# EAGLE board dev-stick (EAGLE 5.07)
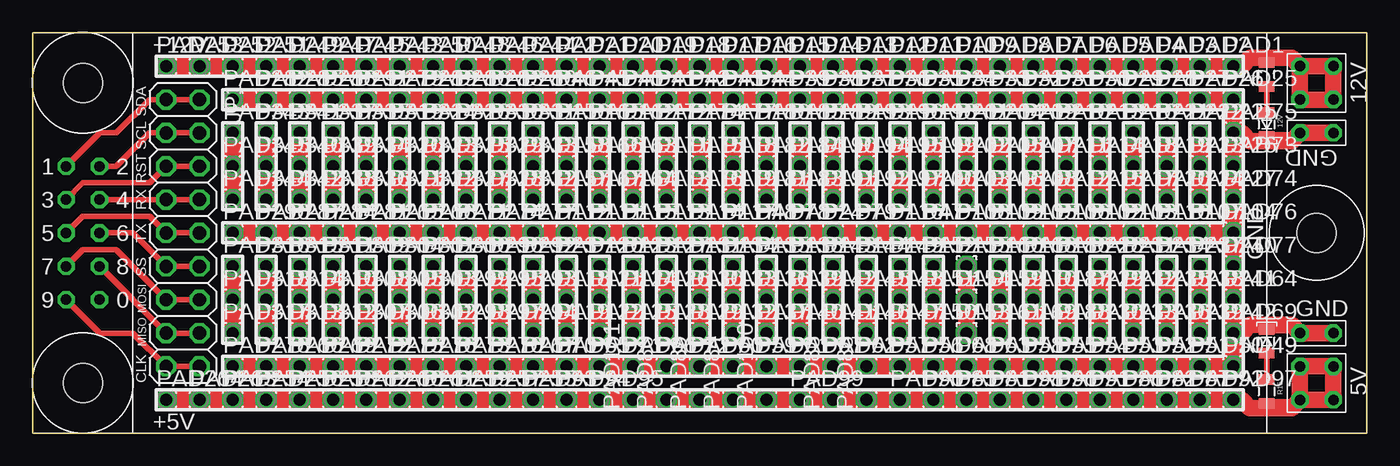
[diagram p0: board, top side]
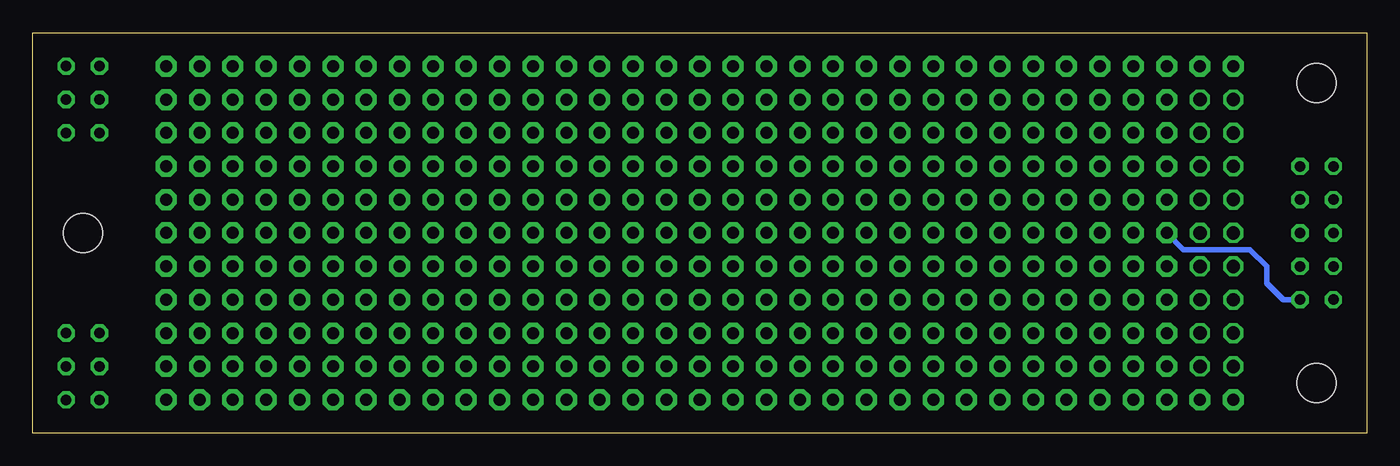
[diagram p1: board, bottom side, seen from below]

Size 101.6 x 30.48 mm. Coordinates in mm from the lower left corner, seen from the top.
Outline: 0,0 101.6,0 101.6,30.48 0,30.48 0,0
Copper layers (1*16): Top 0.035mm / dielectric 1.5mm / Bottom 0.035mm
Design rules "default": minimum track width 10mil, minimum drill 24mil, track to track 8mil, track to pad 8mil, pad to pad 8mil, via to via 8mil, smd to smd 8mil, copper to edge 40mil, drill to drill 8mil, minimum pad ring 10mil, minimum via ring 8mil, stop-mask expansion 4mil, vias tented up to drill 0mil, thermal gap 10mil
Net classes: 0 default: width 0.305 mm; 1 power: width 1.016 mm; 2 motors: width 0.762 mm

## Footprints (pad centres in the part's own frame; a part is rotated, then mirrored left to right if it is on the bottom)
LED-0805 = smd 1.2 x 0.8: A 0,-0.9; C 0,0.9
2X09 = drill 1.016 octagon: 1 -10.16,-1.27; 2 -10.16,1.27; 3 -7.62,-1.27; 4 -7.62,1.27; 5 -5.08,-1.27; 6 -5.08,1.27; 7 -2.54,-1.27; 8 -2.54,1.27; 9 0,-1.27; 10 0,1.27; 11 2.54,-1.27; 12 2.54,1.27; 13 5.08,-1.27; 14 5.08,1.27; 15 7.62,-1.27; 16 7.62,1.27; 17 10.16,-1.27; 18 10.16,1.27
1,6/0,9 = drill 0.914 pad 1.6 octagon: 1 0,0
0805 = smd 0.8 x 1.2: 1 -0.9,0; 2 0.9,0
MAKEITSTICK = drill 0.8 octagon: 5V1 96.52,5.08; 5V2 99.06,5.08; 5V3 96.52,2.54; 5V4 99.06,2.54; 12V1 96.52,27.94; 12V2 99.06,27.94; 12V3 96.52,25.4; 12V4 99.06,25.4; D1 2.54,20.32; D2 5.08,20.32; D3 2.54,17.78; D4 5.08,17.78; D5 2.54,15.24; D6 5.08,15.24; D7 2.54,12.7; D8 5.08,12.7; D9 2.54,10.16; D10 5.08,10.16; GND1 96.52,22.86; GND2 99.06,22.86; GND3 96.52,7.62; GND4 99.06,7.62 | hole 3: 3.81,26.67; 3.81,3.81; 97.79,15.24

## Placement (x,y rotation side)
5V  [LED-0805]  93.98,6.99 0 top
12V  [LED-0805]  93.98,23.5 180 top
JP1  [2X09]  11.43,15.24 270 top
PAD1  WIREPAD1,6/0,9  [1,6/0,9]  91.44,27.94 0 top
PAD2  WIREPAD1,6/0,9  [1,6/0,9]  88.9,27.94 0 top
PAD3  WIREPAD1,6/0,9  [1,6/0,9]  86.36,27.94 0 top
PAD4  WIREPAD1,6/0,9  [1,6/0,9]  83.82,27.94 0 top
PAD5  WIREPAD1,6/0,9  [1,6/0,9]  81.28,27.94 0 top
PAD6  WIREPAD1,6/0,9  [1,6/0,9]  78.74,27.94 0 top
PAD7  WIREPAD1,6/0,9  [1,6/0,9]  76.2,27.94 0 top
PAD8  WIREPAD1,6/0,9  [1,6/0,9]  73.66,27.94 0 top
PAD9  WIREPAD1,6/0,9  [1,6/0,9]  71.12,27.94 0 top
PAD10  WIREPAD1,6/0,9  [1,6/0,9]  68.58,27.94 0 top
PAD11  WIREPAD1,6/0,9  [1,6/0,9]  66.04,27.94 0 top
PAD12  WIREPAD1,6/0,9  [1,6/0,9]  63.5,27.94 0 top
PAD13  WIREPAD1,6/0,9  [1,6/0,9]  60.96,27.94 0 top
PAD14  WIREPAD1,6/0,9  [1,6/0,9]  58.42,27.94 0 top
PAD15  WIREPAD1,6/0,9  [1,6/0,9]  55.88,27.94 0 top
PAD16  WIREPAD1,6/0,9  [1,6/0,9]  53.34,27.94 0 top
PAD17  WIREPAD1,6/0,9  [1,6/0,9]  50.8,27.94 0 top
PAD18  WIREPAD1,6/0,9  [1,6/0,9]  48.26,27.94 0 top
PAD19  WIREPAD1,6/0,9  [1,6/0,9]  45.72,27.94 0 top
PAD20  WIREPAD1,6/0,9  [1,6/0,9]  43.18,27.94 0 top
PAD21  WIREPAD1,6/0,9  [1,6/0,9]  40.64,27.94 0 top
PAD22  WIREPAD1,6/0,9  [1,6/0,9]  38.1,27.94 0 top
PAD23  WIREPAD1,6/0,9  [1,6/0,9]  38.1,12.7 0 top
PAD24  WIREPAD1,6/0,9  [1,6/0,9]  58.42,15.24 0 top
PAD25  WIREPAD1,6/0,9  [1,6/0,9]  91.44,25.4 0 top
PAD26  WIREPAD1,6/0,9  [1,6/0,9]  88.9,25.4 0 top
PAD27  WIREPAD1,6/0,9  [1,6/0,9]  86.36,25.4 0 top
PAD28  WIREPAD1,6/0,9  [1,6/0,9]  83.82,25.4 0 top
PAD29  WIREPAD1,6/0,9  [1,6/0,9]  81.28,25.4 0 top
PAD30  WIREPAD1,6/0,9  [1,6/0,9]  78.74,25.4 0 top
PAD31  WIREPAD1,6/0,9  [1,6/0,9]  76.2,25.4 0 top
PAD32  WIREPAD1,6/0,9  [1,6/0,9]  73.66,25.4 0 top
PAD33  WIREPAD1,6/0,9  [1,6/0,9]  71.12,25.4 0 top
PAD34  WIREPAD1,6/0,9  [1,6/0,9]  68.58,25.4 0 top
PAD35  WIREPAD1,6/0,9  [1,6/0,9]  66.04,25.4 0 top
PAD36  WIREPAD1,6/0,9  [1,6/0,9]  63.5,25.4 0 top
PAD37  WIREPAD1,6/0,9  [1,6/0,9]  60.96,25.4 0 top
PAD38  WIREPAD1,6/0,9  [1,6/0,9]  58.42,25.4 0 top
PAD39  WIREPAD1,6/0,9  [1,6/0,9]  55.88,25.4 0 top
PAD40  WIREPAD1,6/0,9  [1,6/0,9]  43.18,25.4 0 top
PAD41  WIREPAD1,6/0,9  [1,6/0,9]  45.72,25.4 0 top
PAD42  WIREPAD1,6/0,9  [1,6/0,9]  48.26,25.4 0 top
PAD43  WIREPAD1,6/0,9  [1,6/0,9]  50.8,25.4 0 top
PAD44  WIREPAD1,6/0,9  [1,6/0,9]  53.34,25.4 0 top
PAD45  WIREPAD1,6/0,9  [1,6/0,9]  40.64,25.4 0 top
PAD46  WIREPAD1,6/0,9  [1,6/0,9]  38.1,25.4 0 top
PAD47  WIREPAD1,6/0,9  [1,6/0,9]  66.04,15.24 0 top
PAD48  WIREPAD1,6/0,9  [1,6/0,9]  53.34,15.24 0 top
PAD49  WIREPAD1,6/0,9  [1,6/0,9]  91.44,5.08 0 top
PAD50  WIREPAD1,6/0,9  [1,6/0,9]  88.9,5.08 0 top
PAD51  WIREPAD1,6/0,9  [1,6/0,9]  86.36,5.08 0 top
PAD52  WIREPAD1,6/0,9  [1,6/0,9]  83.82,5.08 0 top
PAD53  WIREPAD1,6/0,9  [1,6/0,9]  81.28,5.08 0 top
PAD54  WIREPAD1,6/0,9  [1,6/0,9]  78.74,5.08 0 top
PAD55  WIREPAD1,6/0,9  [1,6/0,9]  76.2,5.08 0 top
PAD56  WIREPAD1,6/0,9  [1,6/0,9]  66.04,5.08 0 top
PAD57  WIREPAD1,6/0,9  [1,6/0,9]  63.5,5.08 0 top
PAD58  WIREPAD1,6/0,9  [1,6/0,9]  73.66,5.08 0 top
PAD59  WIREPAD1,6/0,9  [1,6/0,9]  53.34,5.08 0 top
PAD60  WIREPAD1,6/0,9  [1,6/0,9]  50.8,5.08 0 top
PAD61  WIREPAD1,6/0,9  [1,6/0,9]  55.88,5.08 0 top
PAD62  WIREPAD1,6/0,9  [1,6/0,9]  60.96,5.08 0 top
PAD63  WIREPAD1,6/0,9  [1,6/0,9]  71.12,5.08 0 top
PAD64  WIREPAD1,6/0,9  [1,6/0,9]  91.44,10.16 0 top
PAD65  WIREPAD1,6/0,9  [1,6/0,9]  40.64,5.08 0 top
PAD66  WIREPAD1,6/0,9  [1,6/0,9]  45.72,5.08 0 top
PAD67  WIREPAD1,6/0,9  [1,6/0,9]  58.42,5.08 0 top
PAD68  WIREPAD1,6/0,9  [1,6/0,9]  68.58,5.08 0 top
PAD69  WIREPAD1,6/0,9  [1,6/0,9]  91.44,7.62 0 top
PAD70  WIREPAD1,6/0,9  [1,6/0,9]  38.1,5.08 0 top
PAD71  WIREPAD1,6/0,9  [1,6/0,9]  43.18,5.08 0 top
PAD72  WIREPAD1,6/0,9  [1,6/0,9]  48.26,5.08 0 top
PAD73  WIREPAD1,6/0,9  [1,6/0,9]  91.44,20.32 0 top
PAD74  WIREPAD1,6/0,9  [1,6/0,9]  91.44,17.78 0 top
PAD75  WIREPAD1,6/0,9  [1,6/0,9]  91.44,22.86 0 top
PAD76  WIREPAD1,6/0,9  [1,6/0,9]  91.44,15.24 0 top
PAD77  WIREPAD1,6/0,9  [1,6/0,9]  91.44,12.7 0 top
PAD78  WIREPAD1,6/0,9  [1,6/0,9]  55.88,15.24 0 top
PAD79  WIREPAD1,6/0,9  [1,6/0,9]  60.96,15.24 0 top
PAD80  WIREPAD1,6/0,9  [1,6/0,9]  48.26,2.54 90 top
PAD81  WIREPAD1,6/0,9  [1,6/0,9]  71.12,2.54 0 top
PAD82  WIREPAD1,6/0,9  [1,6/0,9]  83.82,2.54 0 top
PAD83  WIREPAD1,6/0,9  [1,6/0,9]  60.96,2.54 90 top
PAD84  WIREPAD1,6/0,9  [1,6/0,9]  53.34,2.54 90 top
PAD85  WIREPAD1,6/0,9  [1,6/0,9]  68.58,2.54 0 top
PAD86  WIREPAD1,6/0,9  [1,6/0,9]  81.28,2.54 0 top
PAD87  WIREPAD1,6/0,9  [1,6/0,9]  86.36,2.54 0 top
PAD88  WIREPAD1,6/0,9  [1,6/0,9]  63.5,2.54 90 top
PAD89  WIREPAD1,6/0,9  [1,6/0,9]  50.8,2.54 90 top
PAD90  WIREPAD1,6/0,9  [1,6/0,9]  66.04,2.54 0 top
PAD91  WIREPAD1,6/0,9  [1,6/0,9]  78.74,2.54 0 top
PAD92  WIREPAD1,6/0,9  [1,6/0,9]  88.9,2.54 0 top
PAD93  WIREPAD1,6/0,9  [1,6/0,9]  38.1,2.54 0 top
PAD94  WIREPAD1,6/0,9  [1,6/0,9]  40.64,2.54 0 top
PAD95  WIREPAD1,6/0,9  [1,6/0,9]  43.18,2.54 0 top
PAD96  WIREPAD1,6/0,9  [1,6/0,9]  76.2,2.54 0 top
PAD97  WIREPAD1,6/0,9  [1,6/0,9]  91.44,2.54 0 top
PAD98  WIREPAD1,6/0,9  [1,6/0,9]  73.66,2.54 0 top
PAD99  WIREPAD1,6/0,9  [1,6/0,9]  58.42,2.54 0 top
PAD100  WIREPAD1,6/0,9  [1,6/0,9]  55.88,2.54 90 top
PAD101  WIREPAD1,6/0,9  [1,6/0,9]  45.72,2.54 90 top
PAD102  WIREPAD1,6/0,9  [1,6/0,9]  78.74,15.24 0 top
PAD103  WIREPAD1,6/0,9  [1,6/0,9]  81.28,15.24 0 top
PAD104  WIREPAD1,6/0,9  [1,6/0,9]  88.9,15.24 0 top
PAD105  WIREPAD1,6/0,9  [1,6/0,9]  73.66,15.24 0 top
PAD106  WIREPAD1,6/0,9  [1,6/0,9]  76.2,15.24 0 top
PAD107  WIREPAD1,6/0,9  [1,6/0,9]  86.36,15.24 0 top
PAD108  WIREPAD1,6/0,9  [1,6/0,9]  68.58,15.24 0 top
PAD109  WIREPAD1,6/0,9  [1,6/0,9]  71.12,15.24 0 top
PAD110  WIREPAD1,6/0,9  [1,6/0,9]  83.82,15.24 0 top
PAD111  WIREPAD1,6/0,9  [1,6/0,9]  40.64,15.24 0 top
PAD112  WIREPAD1,6/0,9  [1,6/0,9]  38.1,15.24 0 top
PAD113  WIREPAD1,6/0,9  [1,6/0,9]  45.72,15.24 0 top
PAD114  WIREPAD1,6/0,9  [1,6/0,9]  48.26,15.24 0 top
PAD115  WIREPAD1,6/0,9  [1,6/0,9]  43.18,15.24 0 top
PAD116  WIREPAD1,6/0,9  [1,6/0,9]  63.5,15.24 0 top
PAD117  WIREPAD1,6/0,9  [1,6/0,9]  50.8,15.24 0 top
PAD118  WIREPAD1,6/0,9  [1,6/0,9]  38.1,10.16 0 top
PAD119  WIREPAD1,6/0,9  [1,6/0,9]  38.1,7.62 0 top
PAD120  WIREPAD1,6/0,9  [1,6/0,9]  40.64,12.7 0 top
PAD121  WIREPAD1,6/0,9  [1,6/0,9]  40.64,10.16 0 top
PAD122  WIREPAD1,6/0,9  [1,6/0,9]  40.64,7.62 0 top
PAD123  WIREPAD1,6/0,9  [1,6/0,9]  43.18,12.7 0 top
PAD124  WIREPAD1,6/0,9  [1,6/0,9]  43.18,10.16 0 top
PAD125  WIREPAD1,6/0,9  [1,6/0,9]  43.18,7.62 0 top
PAD126  WIREPAD1,6/0,9  [1,6/0,9]  45.72,10.16 0 top
PAD127  WIREPAD1,6/0,9  [1,6/0,9]  45.72,12.7 0 top
PAD128  WIREPAD1,6/0,9  [1,6/0,9]  45.72,7.62 0 top
PAD129  WIREPAD1,6/0,9  [1,6/0,9]  48.26,7.62 0 top
PAD130  WIREPAD1,6/0,9  [1,6/0,9]  48.26,10.16 0 top
PAD131  WIREPAD1,6/0,9  [1,6/0,9]  48.26,12.7 0 top
PAD132  WIREPAD1,6/0,9  [1,6/0,9]  50.8,7.62 0 top
PAD133  WIREPAD1,6/0,9  [1,6/0,9]  50.8,10.16 0 top
PAD134  WIREPAD1,6/0,9  [1,6/0,9]  50.8,12.7 0 top
PAD135  WIREPAD1,6/0,9  [1,6/0,9]  53.34,12.7 0 top
PAD136  WIREPAD1,6/0,9  [1,6/0,9]  53.34,10.16 0 top
PAD137  WIREPAD1,6/0,9  [1,6/0,9]  53.34,7.62 0 top
PAD138  WIREPAD1,6/0,9  [1,6/0,9]  55.88,12.7 0 top
PAD139  WIREPAD1,6/0,9  [1,6/0,9]  55.88,10.16 0 top
PAD140  WIREPAD1,6/0,9  [1,6/0,9]  55.88,7.62 0 top
PAD141  WIREPAD1,6/0,9  [1,6/0,9]  58.42,7.62 0 top
PAD142  WIREPAD1,6/0,9  [1,6/0,9]  58.42,10.16 0 top
PAD143  WIREPAD1,6/0,9  [1,6/0,9]  58.42,12.7 0 top
PAD144  WIREPAD1,6/0,9  [1,6/0,9]  60.96,12.7 0 top
PAD145  WIREPAD1,6/0,9  [1,6/0,9]  60.96,10.16 0 top
PAD146  WIREPAD1,6/0,9  [1,6/0,9]  60.96,7.62 0 top
PAD147  WIREPAD1,6/0,9  [1,6/0,9]  63.5,7.62 0 top
PAD148  WIREPAD1,6/0,9  [1,6/0,9]  63.5,10.16 0 top
PAD149  WIREPAD1,6/0,9  [1,6/0,9]  63.5,12.7 0 top
PAD150  WIREPAD1,6/0,9  [1,6/0,9]  66.04,7.62 0 top
PAD151  WIREPAD1,6/0,9  [1,6/0,9]  66.04,10.16 0 top
PAD152  WIREPAD1,6/0,9  [1,6/0,9]  66.04,12.7 0 top
PAD153  WIREPAD1,6/0,9  [1,6/0,9]  68.58,7.62 0 top
PAD154  WIREPAD1,6/0,9  [1,6/0,9]  68.58,10.16 0 top
PAD155  WIREPAD1,6/0,9  [1,6/0,9]  68.58,12.7 0 top
PAD156  WIREPAD1,6/0,9  [1,6/0,9]  38.1,22.86 0 top
PAD157  WIREPAD1,6/0,9  [1,6/0,9]  38.1,17.78 0 top
PAD158  WIREPAD1,6/0,9  [1,6/0,9]  38.1,20.32 0 top
PAD159  WIREPAD1,6/0,9  [1,6/0,9]  71.12,10.16 0 top
PAD160  WIREPAD1,6/0,9  [1,6/0,9]  71.12,12.7 0 top
PAD161  WIREPAD1,6/0,9  [1,6/0,9]  71.12,7.62 0 top
PAD162  WIREPAD1,6/0,9  [1,6/0,9]  43.18,22.86 0 top
PAD163  WIREPAD1,6/0,9  [1,6/0,9]  43.18,20.32 0 top
PAD164  WIREPAD1,6/0,9  [1,6/0,9]  43.18,17.78 0 top
PAD165  WIREPAD1,6/0,9  [1,6/0,9]  40.64,22.86 0 top
PAD166  WIREPAD1,6/0,9  [1,6/0,9]  40.64,20.32 0 top
PAD167  WIREPAD1,6/0,9  [1,6/0,9]  40.64,17.78 0 top
PAD168  WIREPAD1,6/0,9  [1,6/0,9]  73.66,12.7 0 top
PAD169  WIREPAD1,6/0,9  [1,6/0,9]  73.66,7.62 0 top
PAD170  WIREPAD1,6/0,9  [1,6/0,9]  73.66,10.16 0 top
PAD171  WIREPAD1,6/0,9  [1,6/0,9]  45.72,20.32 0 top
PAD172  WIREPAD1,6/0,9  [1,6/0,9]  45.72,22.86 0 top
PAD173  WIREPAD1,6/0,9  [1,6/0,9]  45.72,17.78 0 top
PAD174  WIREPAD1,6/0,9  [1,6/0,9]  48.26,22.86 0 top
PAD175  WIREPAD1,6/0,9  [1,6/0,9]  48.26,20.32 0 top
PAD176  WIREPAD1,6/0,9  [1,6/0,9]  48.26,17.78 0 top
PAD177  WIREPAD1,6/0,9  [1,6/0,9]  50.8,22.86 0 top
PAD178  WIREPAD1,6/0,9  [1,6/0,9]  50.8,20.32 0 top
PAD179  WIREPAD1,6/0,9  [1,6/0,9]  50.8,17.78 0 top
PAD180  WIREPAD1,6/0,9  [1,6/0,9]  53.34,22.86 0 top
PAD181  WIREPAD1,6/0,9  [1,6/0,9]  53.34,17.78 0 top
PAD182  WIREPAD1,6/0,9  [1,6/0,9]  53.34,20.32 0 top
PAD183  WIREPAD1,6/0,9  [1,6/0,9]  55.88,17.78 0 top
PAD184  WIREPAD1,6/0,9  [1,6/0,9]  55.88,20.32 0 top
PAD185  WIREPAD1,6/0,9  [1,6/0,9]  55.88,22.86 0 top
PAD186  WIREPAD1,6/0,9  [1,6/0,9]  76.2,12.7 0 top
PAD187  WIREPAD1,6/0,9  [1,6/0,9]  76.2,10.16 0 top
PAD188  WIREPAD1,6/0,9  [1,6/0,9]  76.2,7.62 0 top
PAD189  WIREPAD1,6/0,9  [1,6/0,9]  58.42,22.86 0 top
PAD190  WIREPAD1,6/0,9  [1,6/0,9]  58.42,20.32 0 top
PAD191  WIREPAD1,6/0,9  [1,6/0,9]  58.42,17.78 0 top
PAD192  WIREPAD1,6/0,9  [1,6/0,9]  60.96,17.78 0 top
PAD193  WIREPAD1,6/0,9  [1,6/0,9]  60.96,22.86 0 top
PAD194  WIREPAD1,6/0,9  [1,6/0,9]  60.96,20.32 0 top
PAD195  WIREPAD1,6/0,9  [1,6/0,9]  63.5,20.32 0 top
PAD196  WIREPAD1,6/0,9  [1,6/0,9]  63.5,22.86 0 top
PAD197  WIREPAD1,6/0,9  [1,6/0,9]  63.5,17.78 0 top
PAD198  WIREPAD1,6/0,9  [1,6/0,9]  66.04,22.86 0 top
PAD199  WIREPAD1,6/0,9  [1,6/0,9]  66.04,20.32 0 top
PAD200  WIREPAD1,6/0,9  [1,6/0,9]  66.04,17.78 0 top
PAD201  WIREPAD1,6/0,9  [1,6/0,9]  68.58,22.86 0 top
PAD202  WIREPAD1,6/0,9  [1,6/0,9]  68.58,20.32 0 top
PAD203  WIREPAD1,6/0,9  [1,6/0,9]  68.58,17.78 0 top
PAD204  WIREPAD1,6/0,9  [1,6/0,9]  71.12,22.86 0 top
PAD205  WIREPAD1,6/0,9  [1,6/0,9]  71.12,20.32 0 top
PAD206  WIREPAD1,6/0,9  [1,6/0,9]  71.12,17.78 0 top
PAD207  WIREPAD1,6/0,9  [1,6/0,9]  73.66,20.32 0 top
PAD208  WIREPAD1,6/0,9  [1,6/0,9]  73.66,17.78 0 top
PAD209  WIREPAD1,6/0,9  [1,6/0,9]  73.66,22.86 0 top
PAD210  WIREPAD1,6/0,9  [1,6/0,9]  76.2,22.86 0 top
PAD211  WIREPAD1,6/0,9  [1,6/0,9]  76.2,20.32 0 top
PAD212  WIREPAD1,6/0,9  [1,6/0,9]  76.2,17.78 0 top
PAD213  WIREPAD1,6/0,9  [1,6/0,9]  78.74,22.86 0 top
PAD214  WIREPAD1,6/0,9  [1,6/0,9]  78.74,20.32 0 top
PAD215  WIREPAD1,6/0,9  [1,6/0,9]  78.74,17.78 0 top
PAD216  WIREPAD1,6/0,9  [1,6/0,9]  81.28,22.86 0 top
PAD217  WIREPAD1,6/0,9  [1,6/0,9]  81.28,17.78 0 top
PAD218  WIREPAD1,6/0,9  [1,6/0,9]  81.28,20.32 0 top
PAD219  WIREPAD1,6/0,9  [1,6/0,9]  83.82,20.32 0 top
PAD220  WIREPAD1,6/0,9  [1,6/0,9]  83.82,17.78 0 top
PAD221  WIREPAD1,6/0,9  [1,6/0,9]  83.82,22.86 0 top
PAD222  WIREPAD1,6/0,9  [1,6/0,9]  86.36,22.86 0 top
PAD223  WIREPAD1,6/0,9  [1,6/0,9]  86.36,20.32 0 top
PAD224  WIREPAD1,6/0,9  [1,6/0,9]  86.36,17.78 0 top
PAD225  WIREPAD1,6/0,9  [1,6/0,9]  88.9,22.86 0 top
PAD226  WIREPAD1,6/0,9  [1,6/0,9]  88.9,20.32 0 top
PAD227  WIREPAD1,6/0,9  [1,6/0,9]  88.9,17.78 0 top
PAD228  WIREPAD1,6/0,9  [1,6/0,9]  78.74,12.7 0 top
PAD229  WIREPAD1,6/0,9  [1,6/0,9]  78.74,10.16 0 top
PAD230  WIREPAD1,6/0,9  [1,6/0,9]  78.74,7.62 0 top
PAD231  WIREPAD1,6/0,9  [1,6/0,9]  81.28,12.7 0 top
PAD232  WIREPAD1,6/0,9  [1,6/0,9]  81.28,10.16 0 top
PAD233  WIREPAD1,6/0,9  [1,6/0,9]  81.28,7.62 0 top
PAD234  WIREPAD1,6/0,9  [1,6/0,9]  83.82,12.7 0 top
PAD235  WIREPAD1,6/0,9  [1,6/0,9]  83.82,10.16 0 top
PAD236  WIREPAD1,6/0,9  [1,6/0,9]  83.82,7.62 0 top
PAD237  WIREPAD1,6/0,9  [1,6/0,9]  86.36,12.7 0 top
PAD238  WIREPAD1,6/0,9  [1,6/0,9]  86.36,10.16 0 top
PAD239  WIREPAD1,6/0,9  [1,6/0,9]  86.36,7.62 0 top
PAD240  WIREPAD1,6/0,9  [1,6/0,9]  88.9,12.7 0 top
PAD241  WIREPAD1,6/0,9  [1,6/0,9]  88.9,10.16 0 top
PAD242  WIREPAD1,6/0,9  [1,6/0,9]  88.9,7.62 0 top
PAD243  WIREPAD1,6/0,9  [1,6/0,9]  25.4,27.94 0 top
PAD244  WIREPAD1,6/0,9  [1,6/0,9]  35.56,27.94 0 top
PAD245  WIREPAD1,6/0,9  [1,6/0,9]  22.86,27.94 0 top
PAD246  WIREPAD1,6/0,9  [1,6/0,9]  33.02,27.94 0 top
PAD247  WIREPAD1,6/0,9  [1,6/0,9]  20.32,27.94 0 top
PAD248  WIREPAD1,6/0,9  [1,6/0,9]  30.48,27.94 0 top
PAD249  WIREPAD1,6/0,9  [1,6/0,9]  17.78,27.94 0 top
PAD250  WIREPAD1,6/0,9  [1,6/0,9]  27.94,27.94 0 top
PAD251  WIREPAD1,6/0,9  [1,6/0,9]  15.24,27.94 0 top
PAD252  WIREPAD1,6/0,9  [1,6/0,9]  12.7,27.94 0 top
PAD253  WIREPAD1,6/0,9  [1,6/0,9]  10.16,27.94 0 top
PAD254  WIREPAD1,6/0,9  [1,6/0,9]  15.24,2.54 0 top
PAD255  WIREPAD1,6/0,9  [1,6/0,9]  35.56,2.54 0 top
PAD256  WIREPAD1,6/0,9  [1,6/0,9]  17.78,2.54 0 top
PAD257  WIREPAD1,6/0,9  [1,6/0,9]  33.02,2.54 0 top
PAD258  WIREPAD1,6/0,9  [1,6/0,9]  20.32,2.54 0 top
PAD259  WIREPAD1,6/0,9  [1,6/0,9]  30.48,2.54 0 top
PAD260  WIREPAD1,6/0,9  [1,6/0,9]  25.4,2.54 0 top
PAD261  WIREPAD1,6/0,9  [1,6/0,9]  27.94,2.54 0 top
PAD262  WIREPAD1,6/0,9  [1,6/0,9]  22.86,2.54 0 top
PAD263  WIREPAD1,6/0,9  [1,6/0,9]  12.7,2.54 0 top
PAD264  WIREPAD1,6/0,9  [1,6/0,9]  10.16,2.54 0 top
PAD265  WIREPAD1,6/0,9  [1,6/0,9]  25.4,15.24 0 top
PAD266  WIREPAD1,6/0,9  [1,6/0,9]  17.78,5.08 0 top
PAD267  WIREPAD1,6/0,9  [1,6/0,9]  35.56,5.08 0 top
PAD268  WIREPAD1,6/0,9  [1,6/0,9]  27.94,15.24 0 top
PAD269  WIREPAD1,6/0,9  [1,6/0,9]  20.32,5.08 0 top
PAD270  WIREPAD1,6/0,9  [1,6/0,9]  33.02,5.08 0 top
PAD271  WIREPAD1,6/0,9  [1,6/0,9]  30.48,15.24 0 top
PAD272  WIREPAD1,6/0,9  [1,6/0,9]  22.86,5.08 0 top
PAD273  WIREPAD1,6/0,9  [1,6/0,9]  30.48,5.08 0 top
PAD274  WIREPAD1,6/0,9  [1,6/0,9]  33.02,15.24 0 top
PAD275  WIREPAD1,6/0,9  [1,6/0,9]  25.4,5.08 0 top
PAD276  WIREPAD1,6/0,9  [1,6/0,9]  27.94,5.08 0 top
PAD277  WIREPAD1,6/0,9  [1,6/0,9]  35.56,15.24 0 top
PAD278  WIREPAD1,6/0,9  [1,6/0,9]  15.24,5.08 0 top
PAD279  WIREPAD1,6/0,9  [1,6/0,9]  25.4,25.4 0 top
PAD280  WIREPAD1,6/0,9  [1,6/0,9]  35.56,25.4 0 top
PAD281  WIREPAD1,6/0,9  [1,6/0,9]  22.86,15.24 0 top
PAD282  WIREPAD1,6/0,9  [1,6/0,9]  15.24,25.4 0 top
PAD283  WIREPAD1,6/0,9  [1,6/0,9]  33.02,25.4 0 top
PAD284  WIREPAD1,6/0,9  [1,6/0,9]  20.32,15.24 0 top
PAD285  WIREPAD1,6/0,9  [1,6/0,9]  17.78,25.4 0 top
PAD286  WIREPAD1,6/0,9  [1,6/0,9]  30.48,25.4 0 top
PAD287  WIREPAD1,6/0,9  [1,6/0,9]  17.78,15.24 0 top
PAD288  WIREPAD1,6/0,9  [1,6/0,9]  20.32,25.4 0 top
PAD289  WIREPAD1,6/0,9  [1,6/0,9]  27.94,25.4 0 top
PAD290  WIREPAD1,6/0,9  [1,6/0,9]  15.24,15.24 0 top
PAD291  WIREPAD1,6/0,9  [1,6/0,9]  22.86,25.4 0 top
PAD292  WIREPAD1,6/0,9  [1,6/0,9]  35.56,12.7 0 top
PAD293  WIREPAD1,6/0,9  [1,6/0,9]  35.56,10.16 0 top
PAD294  WIREPAD1,6/0,9  [1,6/0,9]  35.56,7.62 0 top
PAD295  WIREPAD1,6/0,9  [1,6/0,9]  33.02,10.16 0 top
PAD296  WIREPAD1,6/0,9  [1,6/0,9]  33.02,12.7 0 top
PAD297  WIREPAD1,6/0,9  [1,6/0,9]  33.02,7.62 0 top
PAD298  WIREPAD1,6/0,9  [1,6/0,9]  30.48,7.62 0 top
PAD299  WIREPAD1,6/0,9  [1,6/0,9]  30.48,10.16 0 top
PAD300  WIREPAD1,6/0,9  [1,6/0,9]  30.48,12.7 0 top
PAD301  WIREPAD1,6/0,9  [1,6/0,9]  27.94,12.7 0 top
PAD302  WIREPAD1,6/0,9  [1,6/0,9]  27.94,7.62 0 top
PAD303  WIREPAD1,6/0,9  [1,6/0,9]  27.94,10.16 0 top
PAD304  WIREPAD1,6/0,9  [1,6/0,9]  25.4,12.7 0 top
PAD305  WIREPAD1,6/0,9  [1,6/0,9]  25.4,10.16 0 top
PAD306  WIREPAD1,6/0,9  [1,6/0,9]  25.4,7.62 0 top
PAD307  WIREPAD1,6/0,9  [1,6/0,9]  22.86,7.62 0 top
PAD308  WIREPAD1,6/0,9  [1,6/0,9]  22.86,10.16 0 top
PAD309  WIREPAD1,6/0,9  [1,6/0,9]  22.86,12.7 0 top
PAD310  WIREPAD1,6/0,9  [1,6/0,9]  20.32,10.16 0 top
PAD311  WIREPAD1,6/0,9  [1,6/0,9]  20.32,12.7 0 top
PAD312  WIREPAD1,6/0,9  [1,6/0,9]  20.32,7.62 0 top
PAD313  WIREPAD1,6/0,9  [1,6/0,9]  17.78,7.62 0 top
PAD314  WIREPAD1,6/0,9  [1,6/0,9]  17.78,10.16 0 top
PAD315  WIREPAD1,6/0,9  [1,6/0,9]  17.78,12.7 0 top
PAD316  WIREPAD1,6/0,9  [1,6/0,9]  15.24,12.7 0 top
PAD317  WIREPAD1,6/0,9  [1,6/0,9]  15.24,7.62 0 top
PAD318  WIREPAD1,6/0,9  [1,6/0,9]  15.24,10.16 0 top
PAD319  WIREPAD1,6/0,9  [1,6/0,9]  25.4,22.86 0 top
PAD320  WIREPAD1,6/0,9  [1,6/0,9]  25.4,20.32 0 top
PAD321  WIREPAD1,6/0,9  [1,6/0,9]  25.4,17.78 0 top
PAD322  WIREPAD1,6/0,9  [1,6/0,9]  27.94,17.78 0 top
PAD323  WIREPAD1,6/0,9  [1,6/0,9]  27.94,20.32 0 top
PAD324  WIREPAD1,6/0,9  [1,6/0,9]  27.94,22.86 0 top
PAD325  WIREPAD1,6/0,9  [1,6/0,9]  30.48,20.32 0 top
PAD326  WIREPAD1,6/0,9  [1,6/0,9]  30.48,22.86 0 top
PAD327  WIREPAD1,6/0,9  [1,6/0,9]  30.48,17.78 0 top
PAD328  WIREPAD1,6/0,9  [1,6/0,9]  33.02,17.78 0 top
PAD329  WIREPAD1,6/0,9  [1,6/0,9]  33.02,20.32 0 top
PAD330  WIREPAD1,6/0,9  [1,6/0,9]  33.02,22.86 0 top
PAD331  WIREPAD1,6/0,9  [1,6/0,9]  35.56,22.86 0 top
PAD332  WIREPAD1,6/0,9  [1,6/0,9]  35.56,17.78 0 top
PAD333  WIREPAD1,6/0,9  [1,6/0,9]  35.56,20.32 0 top
PAD334  WIREPAD1,6/0,9  [1,6/0,9]  22.86,20.32 0 top
PAD335  WIREPAD1,6/0,9  [1,6/0,9]  22.86,22.86 0 top
PAD336  WIREPAD1,6/0,9  [1,6/0,9]  22.86,17.78 0 top
PAD337  WIREPAD1,6/0,9  [1,6/0,9]  20.32,22.86 0 top
PAD338  WIREPAD1,6/0,9  [1,6/0,9]  20.32,17.78 0 top
PAD339  WIREPAD1,6/0,9  [1,6/0,9]  20.32,20.32 0 top
PAD340  WIREPAD1,6/0,9  [1,6/0,9]  17.78,20.32 0 top
PAD341  WIREPAD1,6/0,9  [1,6/0,9]  17.78,22.86 0 top
PAD342  WIREPAD1,6/0,9  [1,6/0,9]  17.78,17.78 0 top
PAD343  WIREPAD1,6/0,9  [1,6/0,9]  15.24,22.86 0 top
PAD344  WIREPAD1,6/0,9  [1,6/0,9]  15.24,17.78 0 top
PAD345  WIREPAD1,6/0,9  [1,6/0,9]  15.24,20.32 0 top
R9  1K  [0805]  93.98,27.3 90 top
R15  1K  [0805]  93.98,3.17 270 top
U$1  MAKERSTICK  [MAKEITSTICK]  0,0 0 top

## Library data of the parts
5V 12V R9 R15 = SparkFun
JP1 = pinhead
PAD1-PAD345 = wirepad
U$1 = crap

## Nets
+12V [power]: PAD1.1 PAD2.1 PAD3.1 PAD4.1 PAD5.1 PAD6.1 PAD7.1 PAD8.1 PAD9.1 PAD10.1 PAD11.1 PAD12.1 PAD13.1 PAD14.1 PAD15.1 PAD16.1 PAD17.1 PAD18.1 PAD19.1 PAD20.1 PAD21.1 PAD22.1 PAD243.1 PAD244.1 PAD245.1 PAD246.1 PAD247.1 PAD248.1 PAD249.1 PAD250.1 PAD251.1 PAD252.1 PAD253.1 R9.2 U$1.12V1 U$1.12V2 U$1.12V3 U$1.12V4
GND [power]: 5V.C 12V.C PAD24.1 PAD25.1 PAD26.1 PAD27.1 PAD28.1 PAD29.1 PAD30.1 PAD31.1 PAD32.1 PAD33.1 PAD34.1 PAD35.1 PAD36.1 PAD37.1 PAD38.1 PAD39.1 PAD40.1 PAD41.1 PAD42.1 PAD43.1 PAD44.1 PAD45.1 PAD46.1 PAD47.1 PAD48.1 PAD49.1 PAD50.1 PAD51.1 PAD52.1 PAD53.1 PAD54.1 PAD55.1 PAD56.1 PAD57.1 PAD58.1 PAD59.1 PAD60.1 PAD61.1 PAD62.1 PAD63.1 PAD64.1 PAD65.1 PAD66.1 PAD67.1 PAD68.1 PAD69.1 PAD70.1 PAD71.1 PAD72.1 PAD73.1 PAD74.1 PAD75.1 PAD76.1 PAD77.1 PAD78.1 PAD79.1 PAD102.1 PAD103.1 PAD104.1 PAD105.1 PAD106.1 PAD107.1 PAD108.1 PAD109.1 PAD110.1 PAD111.1 PAD112.1 PAD113.1 PAD114.1 PAD115.1 PAD116.1 PAD117.1 PAD265.1 PAD266.1 PAD267.1 PAD268.1 PAD269.1 PAD270.1 PAD271.1 PAD272.1 PAD273.1 PAD274.1 PAD275.1 PAD276.1 PAD277.1 PAD278.1 PAD279.1 PAD280.1 PAD281.1 PAD282.1 PAD283.1 PAD284.1 PAD285.1 PAD286.1 PAD287.1 PAD288.1 PAD289.1 PAD290.1 PAD291.1 U$1.D10 U$1.GND1 U$1.GND2 U$1.GND3 U$1.GND4
MISO: JP1.15 JP1.16 U$1.D8
MOSI: JP1.13 JP1.14 U$1.D7
N$1: PAD23.1 PAD118.1 PAD119.1
N$3: PAD120.1 PAD121.1 PAD122.1
N$4: PAD123.1 PAD124.1 PAD125.1
N$5: PAD126.1 PAD127.1 PAD128.1
N$6: PAD129.1 PAD130.1 PAD131.1
N$7: PAD132.1 PAD133.1 PAD134.1
N$8: PAD292.1 PAD293.1 PAD294.1
N$9: PAD135.1 PAD136.1 PAD137.1
N$10: PAD138.1 PAD139.1 PAD140.1
N$11: PAD141.1 PAD142.1 PAD143.1
N$12: PAD144.1 PAD145.1 PAD146.1
N$13: PAD147.1 PAD148.1 PAD149.1
N$14: PAD150.1 PAD151.1 PAD152.1
N$15: PAD153.1 PAD154.1 PAD155.1
N$16: PAD156.1 PAD157.1 PAD158.1
N$17: PAD159.1 PAD160.1 PAD161.1
N$18: PAD162.1 PAD163.1 PAD164.1
N$19: PAD165.1 PAD166.1 PAD167.1
N$20: PAD295.1 PAD296.1 PAD297.1
N$21: PAD168.1 PAD169.1 PAD170.1
N$22: PAD171.1 PAD172.1 PAD173.1
N$23: PAD174.1 PAD175.1 PAD176.1
N$24: PAD177.1 PAD178.1 PAD179.1
N$25: 5V.A R15.1
N$26: 12V.A R9.1
N$27: PAD180.1 PAD181.1 PAD182.1
N$28: PAD183.1 PAD184.1 PAD185.1
N$29: PAD186.1 PAD187.1 PAD188.1
N$30: PAD189.1 PAD190.1 PAD191.1
N$31: PAD192.1 PAD193.1 PAD194.1
N$32: PAD195.1 PAD196.1 PAD197.1
N$33: PAD198.1 PAD199.1 PAD200.1
N$34: PAD201.1 PAD202.1 PAD203.1
N$35: PAD204.1 PAD205.1 PAD206.1
N$36: PAD207.1 PAD208.1 PAD209.1
N$37: PAD210.1 PAD211.1 PAD212.1
N$38: PAD213.1 PAD214.1 PAD215.1
N$39: PAD216.1 PAD217.1 PAD218.1
N$40: PAD219.1 PAD220.1 PAD221.1
N$41: PAD222.1 PAD223.1 PAD224.1
N$42: PAD225.1 PAD226.1 PAD227.1
N$43: PAD228.1 PAD229.1 PAD230.1
N$44: PAD231.1 PAD232.1 PAD233.1
N$45: PAD234.1 PAD235.1 PAD236.1
N$46: PAD237.1 PAD238.1 PAD239.1
N$47: PAD240.1 PAD241.1 PAD242.1
N$48: PAD298.1 PAD299.1 PAD300.1
N$49: PAD301.1 PAD302.1 PAD303.1
N$50: PAD304.1 PAD305.1 PAD306.1
N$51: PAD307.1 PAD308.1 PAD309.1
N$52: PAD310.1 PAD311.1 PAD312.1
N$53: PAD313.1 PAD314.1 PAD315.1
N$54: PAD316.1 PAD317.1 PAD318.1
N$55: PAD319.1 PAD320.1 PAD321.1
N$56: PAD322.1 PAD323.1 PAD324.1
N$57: PAD325.1 PAD326.1 PAD327.1
N$58: PAD328.1 PAD329.1 PAD330.1
N$59: PAD331.1 PAD332.1 PAD333.1
N$60: PAD334.1 PAD335.1 PAD336.1
N$61: PAD337.1 PAD338.1 PAD339.1
N$62: PAD340.1 PAD341.1 PAD342.1
N$63: PAD343.1 PAD344.1 PAD345.1
RESET: JP1.5 JP1.6 U$1.D3
RX: JP1.7 JP1.8 U$1.D4
SCK: JP1.17 JP1.18 U$1.D9
SCL: JP1.3 JP1.4 U$1.D2
SDA: JP1.1 JP1.2 U$1.D1
SS: JP1.11 JP1.12 U$1.D6
TX: JP1.9 JP1.10 U$1.D5
VCC: PAD80.1 PAD81.1 PAD82.1 PAD83.1 PAD84.1 PAD85.1 PAD86.1 PAD87.1 PAD88.1 PAD89.1 PAD90.1 PAD91.1 PAD92.1 PAD93.1 PAD94.1 PAD95.1 PAD96.1 PAD97.1 PAD98.1 PAD99.1 PAD100.1 PAD101.1 PAD254.1 PAD255.1 PAD256.1 PAD257.1 PAD258.1 PAD259.1 PAD260.1 PAD261.1 PAD262.1 PAD263.1 PAD264.1 R15.2 U$1.5V1 U$1.5V2 U$1.5V3 U$1.5V4

## Tracks (layer width: path | path; a pad name or v marks a point on that pad's centre or on a via)
+12V
  Top 0.61: R9.2 93.72,28.2 93.34,28.57
  Top 1.27: U$1.12V1 U$1.12V3 U$1.12V4 U$1.12V2 U$1.12V1 | U$1.12V1 95.89,28.57 93.34,28.57 92.71,28.57 92.08,27.94 PAD1.1 PAD2.1 PAD3.1 PAD4.1 PAD5.1 PAD6.1 PAD7.1 PAD8.1 PAD9.1 PAD10.1 PAD11.1 PAD12.1 PAD13.1 PAD14.1 PAD15.1 PAD16.1 PAD17.1 PAD18.1 PAD19.1 PAD20.1 PAD21.1 PAD22.1 PAD244.1 PAD246.1 PAD248.1 PAD250.1 PAD243.1 PAD245.1 PAD247.1 PAD249.1 PAD251.1 PAD252.1 PAD253.1
GND
  Top 0.61: 12V.C 96.25,22.59 U$1.GND1 | 5V.C 96.25,7.88 U$1.GND3
  Top 1.27: PAD75.1 PAD25.1 PAD26.1 PAD27.1 PAD28.1 PAD29.1 PAD30.1 PAD31.1 PAD32.1 PAD33.1 PAD34.1 PAD35.1 PAD36.1 PAD37.1 PAD38.1 PAD39.1 PAD44.1 PAD43.1 PAD42.1 PAD41.1 PAD40.1 PAD45.1 PAD46.1 PAD280.1 PAD283.1 PAD286.1 PAD289.1 PAD279.1 PAD291.1 PAD288.1 PAD285.1 PAD282.1 | PAD75.1 PAD73.1 PAD74.1 PAD76.1 | PAD76.1 PAD77.1 PAD64.1 PAD69.1 | PAD69.1 PAD49.1 PAD50.1 PAD51.1 PAD52.1 PAD53.1 PAD54.1 PAD55.1 PAD58.1 PAD63.1 PAD68.1 PAD56.1 PAD57.1 PAD62.1 PAD67.1 PAD61.1 PAD59.1 PAD60.1 PAD72.1 PAD66.1 PAD71.1 PAD65.1 PAD70.1 PAD267.1 PAD270.1 PAD273.1 PAD276.1 PAD275.1 PAD272.1 PAD269.1 PAD266.1 PAD278.1 | U$1.GND4 U$1.GND3 95.89,8.26 92.71,8.26 92.08,7.62 PAD69.1 | U$1.GND2 U$1.GND1 95.89,22.23 92.71,22.23 92.08,22.86 PAD75.1 | PAD76.1 PAD104.1 PAD107.1 PAD110.1 PAD103.1 PAD102.1 PAD106.1 PAD105.1 PAD109.1 PAD108.1 PAD47.1 PAD116.1 PAD79.1 PAD24.1 PAD78.1 PAD48.1 PAD117.1 PAD114.1 PAD113.1 PAD115.1 PAD111.1 PAD112.1 PAD277.1 PAD274.1 PAD271.1 PAD268.1 PAD265.1 PAD281.1 PAD284.1 PAD287.1 PAD290.1
  Bottom 0.406: U$1.D10 6.35,10.16 7.62,11.43 7.62,12.7 8.89,13.97 13.97,13.97 PAD290.1
MISO
  Top 0.406: U$1.D8 JP1.15 JP1.16
MOSI
  Top 0.406: U$1.D7 3.81,13.97 6.35,13.97 JP1.13 JP1.14
N$1
  Top 1.27: PAD23.1 PAD118.1 PAD119.1
N$3
  Top 1.27: PAD120.1 PAD121.1 PAD122.1
N$4
  Top 1.27: PAD123.1 PAD124.1 PAD125.1
N$5
  Top 1.27: PAD127.1 PAD126.1 PAD128.1
N$6
  Top 1.27: PAD131.1 PAD130.1 PAD129.1
N$7
  Top 1.27: PAD134.1 PAD133.1 PAD132.1
N$8
  Top 1.27: PAD292.1 PAD293.1 PAD294.1
N$9
  Top 1.27: PAD135.1 PAD136.1 PAD137.1
N$10
  Top 1.27: PAD138.1 PAD139.1 PAD140.1
N$11
  Top 1.27: PAD143.1 PAD142.1 PAD141.1
N$12
  Top 1.27: PAD144.1 PAD145.1 PAD146.1
N$13
  Top 1.27: PAD149.1 PAD148.1 PAD147.1
N$14
  Top 1.27: PAD152.1 PAD151.1 PAD150.1
N$15
  Top 1.27: PAD155.1 PAD154.1 PAD153.1
N$16
  Top 1.27: PAD156.1 PAD158.1 PAD157.1
N$17
  Top 1.27: PAD160.1 PAD159.1 PAD161.1
N$18
  Top 1.27: PAD162.1 PAD163.1 PAD164.1
N$19
  Top 1.27: PAD165.1 PAD166.1 PAD167.1
N$20
  Top 1.27: PAD297.1 PAD295.1 PAD296.1
N$21
  Top 1.27: PAD168.1 PAD170.1 PAD169.1
N$22
  Top 1.27: PAD172.1 PAD171.1 PAD173.1
N$23
  Top 1.27: PAD174.1 PAD175.1 PAD176.1
N$24
  Top 1.27: PAD177.1 PAD178.1 PAD179.1
N$25
  Top 0.406: R15.1 5V.A
N$26
  Top 0.406: 12V.A R9.1
N$27
  Top 1.27: PAD180.1 PAD182.1 PAD181.1
N$28
  Top 1.27: PAD185.1 PAD184.1 PAD183.1
N$29
  Top 1.27: PAD186.1 PAD187.1 PAD188.1
N$30
  Top 1.27: PAD189.1 PAD190.1 PAD191.1
N$31
  Top 1.27: PAD193.1 PAD194.1 PAD192.1
N$32
  Top 1.27: PAD196.1 PAD195.1 PAD197.1
N$33
  Top 1.27: PAD198.1 PAD199.1 PAD200.1
N$34
  Top 1.27: PAD201.1 PAD202.1 PAD203.1
N$35
  Top 1.27: PAD204.1 PAD205.1 PAD206.1
N$36
  Top 1.27: PAD209.1 PAD207.1 PAD208.1
N$37
  Top 1.27: PAD210.1 PAD211.1 PAD212.1
N$38
  Top 1.27: PAD213.1 PAD214.1 PAD215.1
N$39
  Top 1.27: PAD216.1 PAD218.1 PAD217.1
N$40
  Top 1.27: PAD221.1 PAD219.1 PAD220.1
N$41
  Top 1.27: PAD222.1 PAD223.1 PAD224.1
N$42
  Top 1.27: PAD225.1 PAD226.1 PAD227.1
N$43
  Top 1.27: PAD228.1 PAD229.1 PAD230.1
N$44
  Top 1.27: PAD231.1 PAD232.1 PAD233.1
N$45
  Top 1.27: PAD234.1 PAD235.1 PAD236.1
N$46
  Top 1.27: PAD237.1 PAD238.1 PAD239.1
N$47
  Top 1.27: PAD240.1 PAD241.1 PAD242.1
N$48
  Top 1.27: PAD300.1 PAD299.1 PAD298.1
N$49
  Top 1.27: PAD302.1 PAD303.1 PAD301.1
N$50
  Top 1.27: PAD304.1 PAD305.1 PAD306.1
N$51
  Top 1.27: PAD307.1 PAD308.1 PAD309.1
N$52
  Top 1.27: PAD311.1 PAD310.1 PAD312.1
N$53
  Top 1.27: PAD313.1 PAD314.1 PAD315.1
N$54
  Top 1.27: PAD316.1 PAD318.1 PAD317.1
N$55
  Top 1.27: PAD319.1 PAD320.1 PAD321.1
N$56
  Top 1.27: PAD322.1 PAD323.1 PAD324.1
N$57
  Top 1.27: PAD326.1 PAD325.1 PAD327.1
N$58
  Top 1.27: PAD328.1 PAD329.1 PAD330.1
N$59
  Top 1.27: PAD331.1 PAD333.1 PAD332.1
N$60
  Top 1.27: PAD336.1 PAD334.1 PAD335.1
N$61
  Top 1.27: PAD337.1 PAD339.1 PAD338.1
N$62
  Top 1.27: PAD342.1 PAD340.1 PAD341.1
N$63
  Top 1.27: PAD343.1 PAD345.1 PAD344.1
RESET
  Top 0.406: U$1.D3 3.81,19.05 8.89,19.05 JP1.5 JP1.6
RX
  Top 0.406: U$1.D4 JP1.7 JP1.8
SCK
  Top 0.406: U$1.D9 5.08,7.62 7.62,7.62 JP1.17 JP1.18
SCL
  Top 0.406: U$1.D2 6.35,20.32 8.89,22.86 JP1.3 JP1.4
SDA
  Top 0.406: U$1.D1 5.08,22.86 6.35,22.86 8.89,25.4 JP1.1 JP1.2
SS
  Top 0.406: U$1.D6 7.62,15.24 JP1.11 JP1.12
TX
  Top 0.406: U$1.D5 3.81,16.51 8.89,16.51 JP1.9 JP1.10
VCC
  Top 0.61: R15.2 96.25,2.27 U$1.5V3
  Top 1.27: U$1.5V3 U$1.5V4 U$1.5V2 U$1.5V1 U$1.5V3 | U$1.5V3 95.89,1.91 92.71,1.91 92.08,2.54 PAD97.1 PAD92.1 PAD87.1 PAD82.1 PAD86.1 PAD91.1 PAD96.1 PAD98.1 PAD81.1 PAD85.1 PAD90.1 PAD88.1 PAD83.1 PAD99.1 PAD100.1 PAD84.1 PAD89.1 PAD80.1 PAD101.1 PAD95.1 PAD94.1 PAD93.1 PAD255.1 PAD257.1 PAD259.1 PAD261.1 PAD260.1 PAD262.1 PAD258.1 PAD256.1 PAD254.1 PAD263.1 PAD264.1

## Text on the board
tPlace: +12V | SDA | SCL | RST | RX | TX | GND | SS | MOSI | MISO | CLK | +5V